# EAGLE board filter (EAGLE 9.6.1)
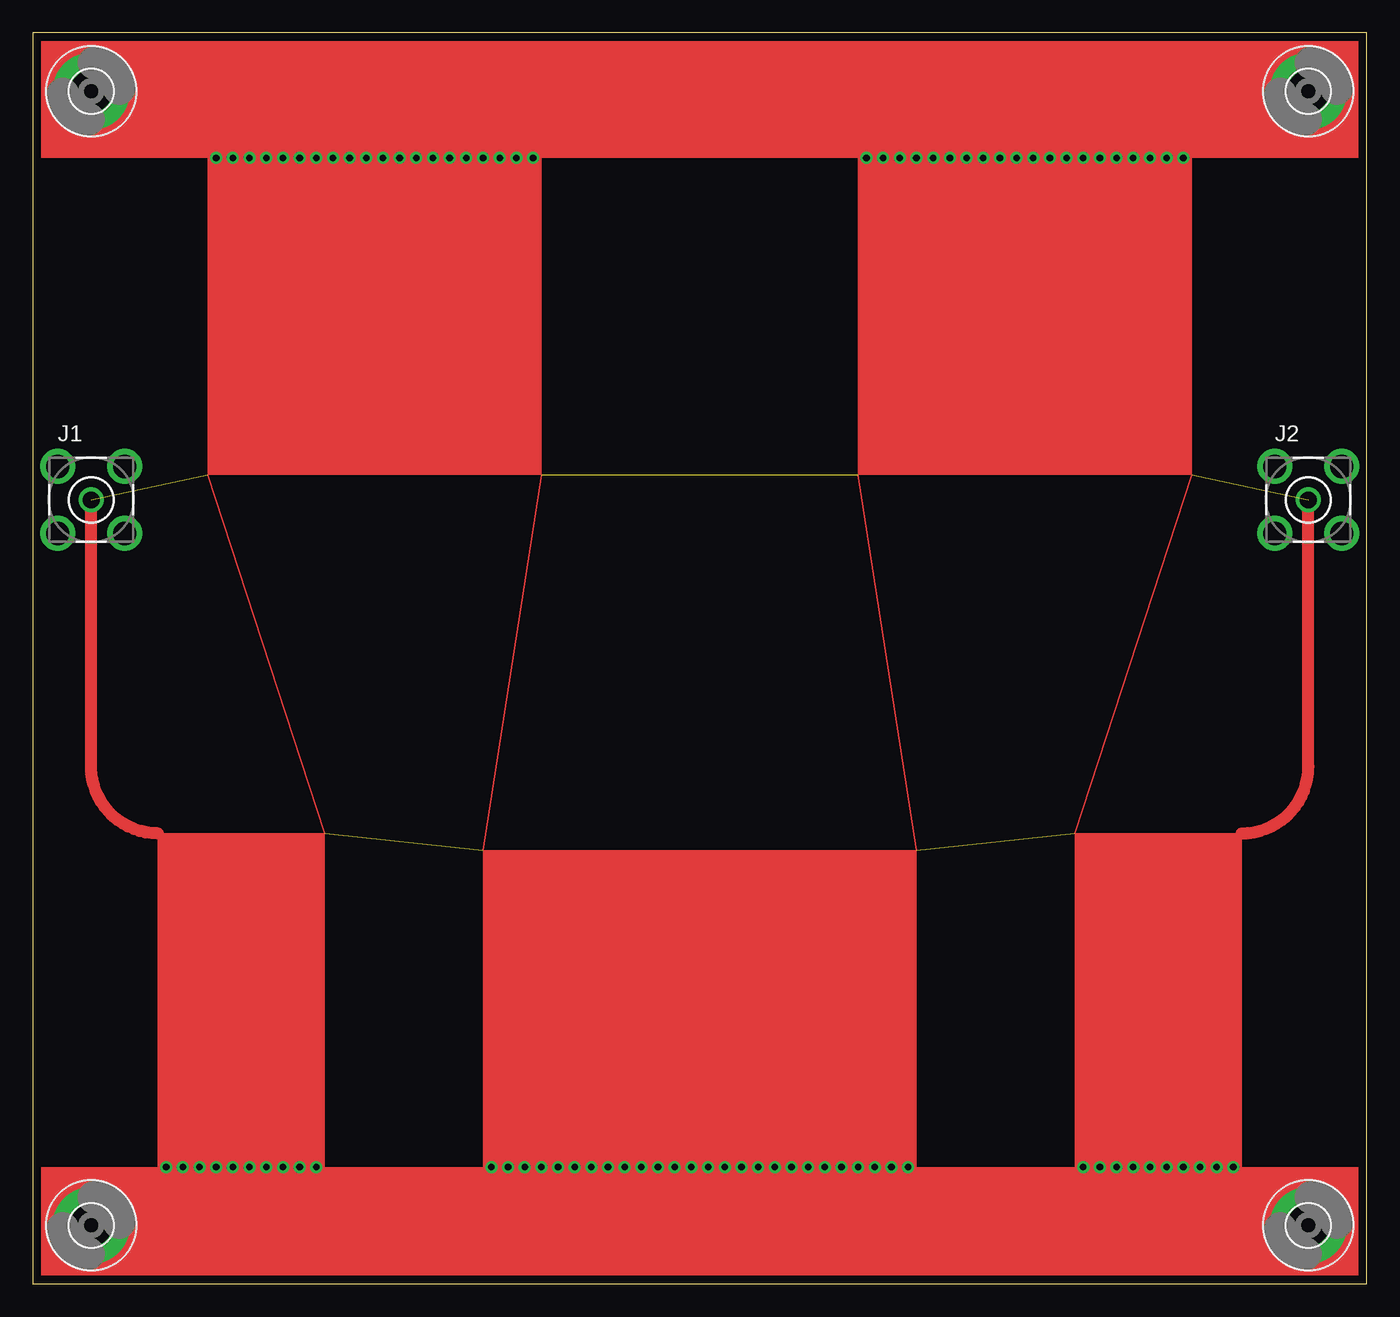
[diagram p0: board, top side]
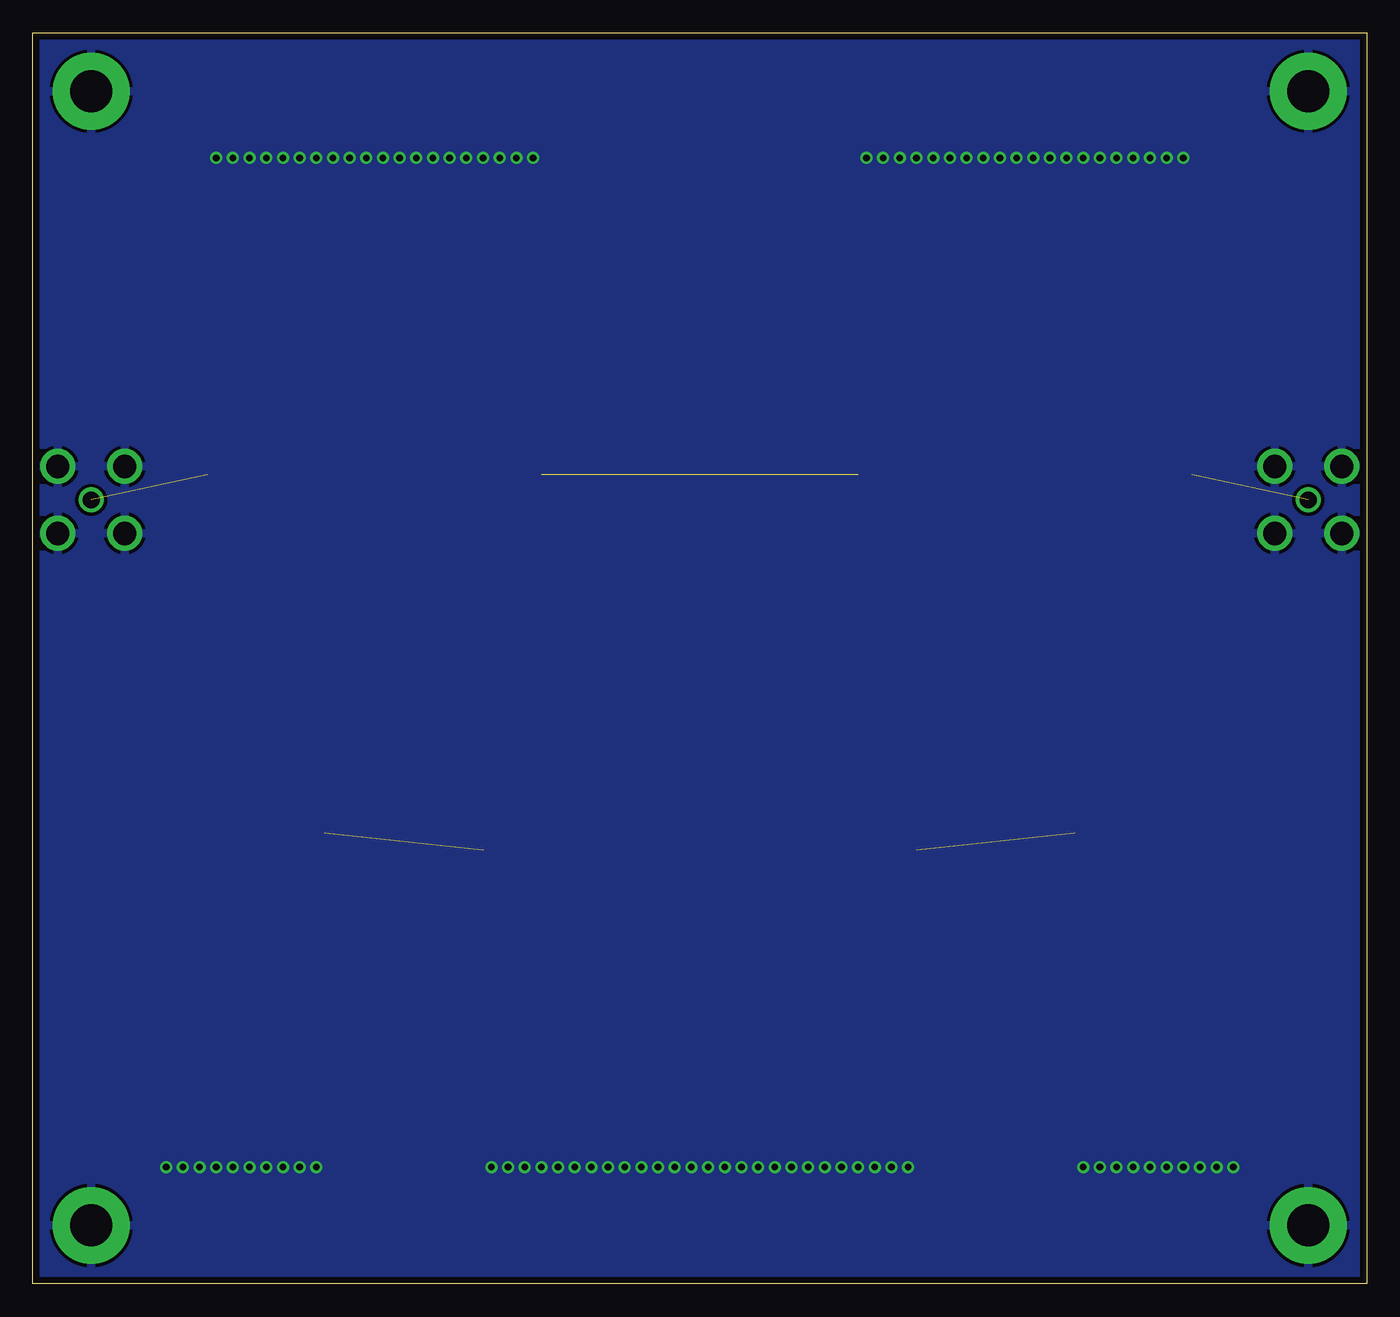
[diagram p1: board, bottom side, seen from below]

Size 101.6 x 95.25 mm. Coordinates in mm from the lower left corner, seen from the top.
Outline: 0,0 101.6,0 101.6,95.25 0,95.25 0,0
Copper layers (1*16): Top 0.035mm / dielectric 0.5mm / Bottom 0.035mm
Design rules "two_layer": minimum track width 5mil, minimum drill 10mil, track to track 5mil, track to pad 5mil, pad to pad 5mil, via to via 5mil, smd to smd 5mil, copper to edge 20mil, drill to drill 8mil, minimum pad ring 10mil, minimum via ring 8mil, stop-mask expansion 4mil, vias tented up to drill 0mil, thermal gap 10mil

## Footprints (pad centres in the part's own frame; a part is rotated, then mirrored left to right if it is on the bottom)
3,2-PAD = drill 3.2 pad 5.842: B3,2 0,0
BU-SMA-V = drill 1.27: 1 0,0 | drill 1.778: 2 -2.55,2.55; 3 2.55,2.55; 4 2.55,-2.55; 5 -2.55,-2.55

## Placement (x,y rotation side)
E$3  [3,2-PAD]  4.45,90.81 0 top
E$4  [3,2-PAD]  97.16,90.81 0 top
E$5  [3,2-PAD]  97.16,4.45 0 top
E$6  [3,2-PAD]  4.45,4.45 0 top
J1  [BU-SMA-V]  4.45,59.69 0 top
J2  [BU-SMA-V]  97.16,59.69 0 top

## Library data of the parts
E$3-E$6 = holes
J1 J2 = con-coax

## Nets
FILT: J1.1 J2.1
GND: E$3.B3,2 E$4.B3,2 E$5.B3,2 E$6.B3,2 J1.2 J1.3 J1.4 J1.5 J2.2 J2.3 J2.4 J2.5

## Tracks (layer width: path | path; a pad name or v marks a point on that pad's centre or on a via)
FILT  (5 unrouted)
  Top 0.127: 13.34,61.59 22.23,34.29 | 38.73,61.59 34.29,33.02 | 62.87,61.59 67.31,33.02 | 79.38,34.29 88.27,61.59
  Top 0.914: 9.53,34.29 arc-90 4.45,39.37 J1.1 | 92.08,34.29 arc90 97.16,39.37 J2.1
GND  (via drill 0.51)
  other vias: 13.97,85.72 15.24,85.72 16.51,85.72 17.78,85.72 19.05,85.72 20.32,85.72 21.59,85.72 22.86,85.72 24.13,85.72 25.4,85.72 26.67,85.72 27.94,85.72 29.21,85.72 30.48,85.72 31.75,85.72 33.02,85.72 34.29,85.72 35.56,85.72 36.83,85.72 38.1,85.72 63.5,85.72 64.77,85.72 66.04,85.72 67.31,85.72 68.58,85.72 69.85,85.72 71.12,85.72 72.39,85.72 73.66,85.72 74.93,85.72 76.2,85.72 77.47,85.72 78.74,85.72 80.01,85.72 81.28,85.72 82.55,85.72 83.82,85.72 85.09,85.72 86.36,85.72 87.63,85.72 10.16,8.89 11.43,8.89 12.7,8.89 13.97,8.89 15.24,8.89 16.51,8.89 17.78,8.89 19.05,8.89 20.32,8.89 21.59,8.89 80.01,8.89 81.28,8.89 82.55,8.89 83.82,8.89 85.09,8.89 86.36,8.89 87.63,8.89 88.9,8.89 90.17,8.89 91.44,8.89 34.92,8.89 36.2,8.89 37.47,8.89 38.73,8.89 40.01,8.89 41.27,8.89 42.55,8.89 43.81,8.89 45.09,8.89 46.35,8.89 47.62,8.89 48.9,8.89 50.16,8.89 51.44,8.89 52.7,8.89 53.98,8.89 55.24,8.89 56.52,8.89 57.78,8.89 59.05,8.89 60.33,8.89 61.59,8.89 62.87,8.89 64.14,8.89 65.41,8.89 66.67,8.89
  pour Bottom (isolate 0.254, rank 6): 0.64,94.61 100.97,94.61 100.97,0.64 0.64,0.64
(copper drawn outside any net)
  shapes: Top area x7